# EAGLE board AccelBreakout (EAGLE 7.0.0)
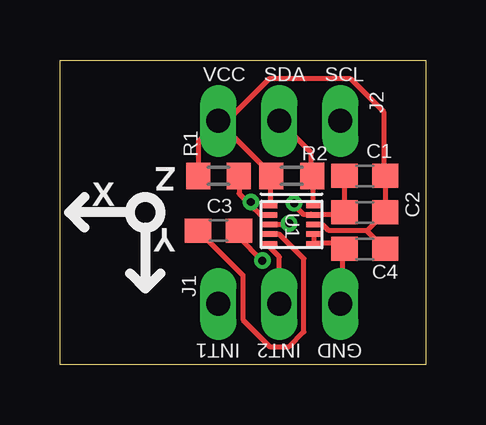
[diagram p0: board, top side]
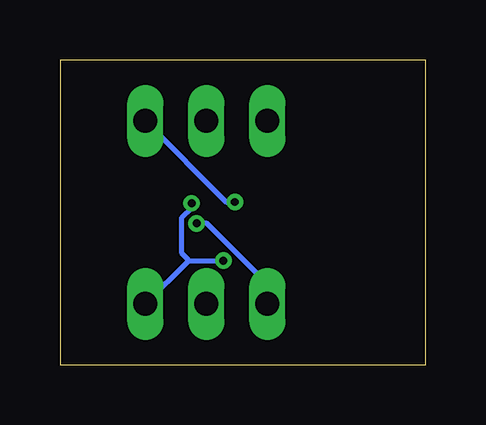
[diagram p1: board, bottom side, seen from below]

Size 15.24 x 12.7 mm. Coordinates in mm from the lower left corner, seen from the top.
Outline: 15.24,0 0,0 0,12.7 15.24,12.7 15.24,0
Copper layers (1*16): Top 0.0356mm / dielectric 1.5011mm / Bottom 0.0356mm
Design rules "LaenPCBOrder *": minimum track width 8mil, minimum drill 13mil, track to track 6mil, track to pad 6mil, pad to pad 6mil, via to via 6mil, smd to smd 6mil, copper to edge 15mil, drill to drill 6mil, minimum pad ring 7mil, minimum via ring 7mil, stop-mask expansion 3mil, vias tented up to drill 0mil, thermal gap 10mil

## Footprints (pad centres in the part's own frame; a part is rotated, then mirrored left to right if it is on the bottom)
C0603 = smd 1.1 x 1: 1 -0.85,0; 2 0.85,0
R0603 = smd 1 x 1.1: 1 -0.85,0; 2 0.85,0
DIP1X3MALE = drill 1 long: P$1 -2.54,0; P$2 0,0; P$3 2.54,0
MMA8653FCR1 = smd 0.6 x 0.225: 1 -0.9,0.8; 2 -0.9,0.4; 3 -0.9,0; 4 -0.9,-0.4; 5 -0.9,-0.8; 6 0.9,-0.8; 7 0.9,-0.4; 8 0.9,0; 9 0.9,0.4; 10 0.9,0.8

## Placement (x,y rotation side)
C1  0.1uF  [C0603]  12.7,7.87 180 top
C2  1uF  [C0603]  12.7,6.35 180 top
C3  0.1uF  [C0603]  6.6,5.59 0 top
C4  0.1uF  [C0603]  12.7,4.83 180 top
R1  10K  [R0603]  6.6,7.87 180 top
R2  10K  [R0603]  9.65,7.87 180 top
U$2  ACCELDIR  [ACCELDIR]  3.56,5.71 0 top
U$3  DIP1X3MALE  [DIP1X3MALE]  9.14,10.16 0 top
U$4  DIP1X3MALE  [DIP1X3MALE]  9.14,2.54 0 top
U$23  MMA8653FCR1  [MMA8653FCR1]  9.65,5.84 0 top

## Library data of the parts
C1-C4 R1 R2 = resistor
U$2 U$23 = ScottSilver
U$3 U$4 = OldScottSilver

## Nets
GND: C1.2 C2.2 C3.2 C4.2 U$4.P$3 U$23.6 U$23.7 U$23.9
INT1: U$4.P$1 U$23.3
INT2: U$4.P$2 U$23.5
N$34: C3.1 U$23.4
SCL: R1.1 U$3.P$3 U$23.2
SDA: R2.1 U$3.P$2 U$23.10
VCC: C1.1 C2.1 C4.1 R1.2 R2.2 U$3.P$1 U$23.1 U$23.8

## Tracks (layer width: path | path; a pad name or v marks a point on that pad's centre or on a via)
GND  (via drill 0.33)
  Top 0.203: C1.2 11.86,7.87 11.86,6.43 C2.2 11.84,6.35 11.73,6.25 10.57,6.25 U$23.9 10.46,6.27 10.13,6.27 9.75,6.66 v9.75,6.73 | U$23.7 10.57,5.44 10.57,5.05 U$23.6 10.67,5.05 11.61,5.05 11.84,4.83 C4.2 11.79,4.75 11.79,2.64 U$4.P$3 | v8.43,4.34 7.47,5.31 7.47,5.59 C3.2
  Bottom 0.203: 9.88,4.34 v8.43,4.34 | U$4.P$3 9.88,4.34 | v9.75,6.73 9.75,6.55 10.16,6.15 10.16,4.65 9.93,4.42 9.88,4.34
INT1  (via drill 0.33)
  Top 0.203: U$23.3 9.5,5.84 v9.55,5.89
  Bottom 0.203: v9.55,5.89 9.12,5.89 6.6,3.38 U$4.P$1
INT2
  Top 0.203: U$4.P$2 9.14,4.5 8.76,4.88 8.76,5.03 U$23.5
N$34
  Top 0.203: U$23.4 8.76,5.44 9.14,5.44 10.16,4.42 10.16,1.37 9.55,0.76 8.74,0.76 7.62,1.88 7.62,3.73 5.77,5.59 C3.1
SCL  (via drill 0.33)
  Top 0.203: 7.89,6.72 7.47,7.14 7.47,7.87 R1.1 | 7.89,6.72 8.36,6.25 8.74,6.25 U$23.2 | v7.95,6.78 7.89,6.72
  Bottom 0.203: v7.95,6.78 8.31,6.78 U$3.P$3
SDA
  Top 0.203: U$23.10 10.54,6.66 10.54,7.85 10.52,7.87 R2.1 10.44,7.95 10.44,8.87 U$3.P$2
VCC
  Top 0.203: U$23.8 10.95,5.84 11.2,5.59 12.78,5.59 | 12.78,5.59 13.54,6.35 C2.1 13.56,6.43 13.56,7.87 C1.1 13.49,7.95 13.49,10.54 12.09,11.94 8.74,11.94 6.83,10.03 U$3.P$1 | 12.78,5.59 13.54,4.83 C4.1 | U$23.1 8.76,6.66 8.76,7.85 8.79,7.87 R2.2 8.74,7.95 8.74,8 6.66,10.08 U$3.P$1 | U$3.P$1 5.77,9.32 5.77,7.87 R1.2

## Text on the board
tPlace: VCC | SDA | SCL | J2 | U1 | J1 | INT1 | INT2 | GND